# Altium PCB OPENMV4_BASE.PcbDoc
Units mm, origin at the board's own origin, x right, y up, seen from the top; angles counter-clockwise.
Board outline 35 x 44.63 mm, 2 copper layers (Top Layer, Bottom Layer); 49 components, 64 nets, 267 pads, 105 vias.
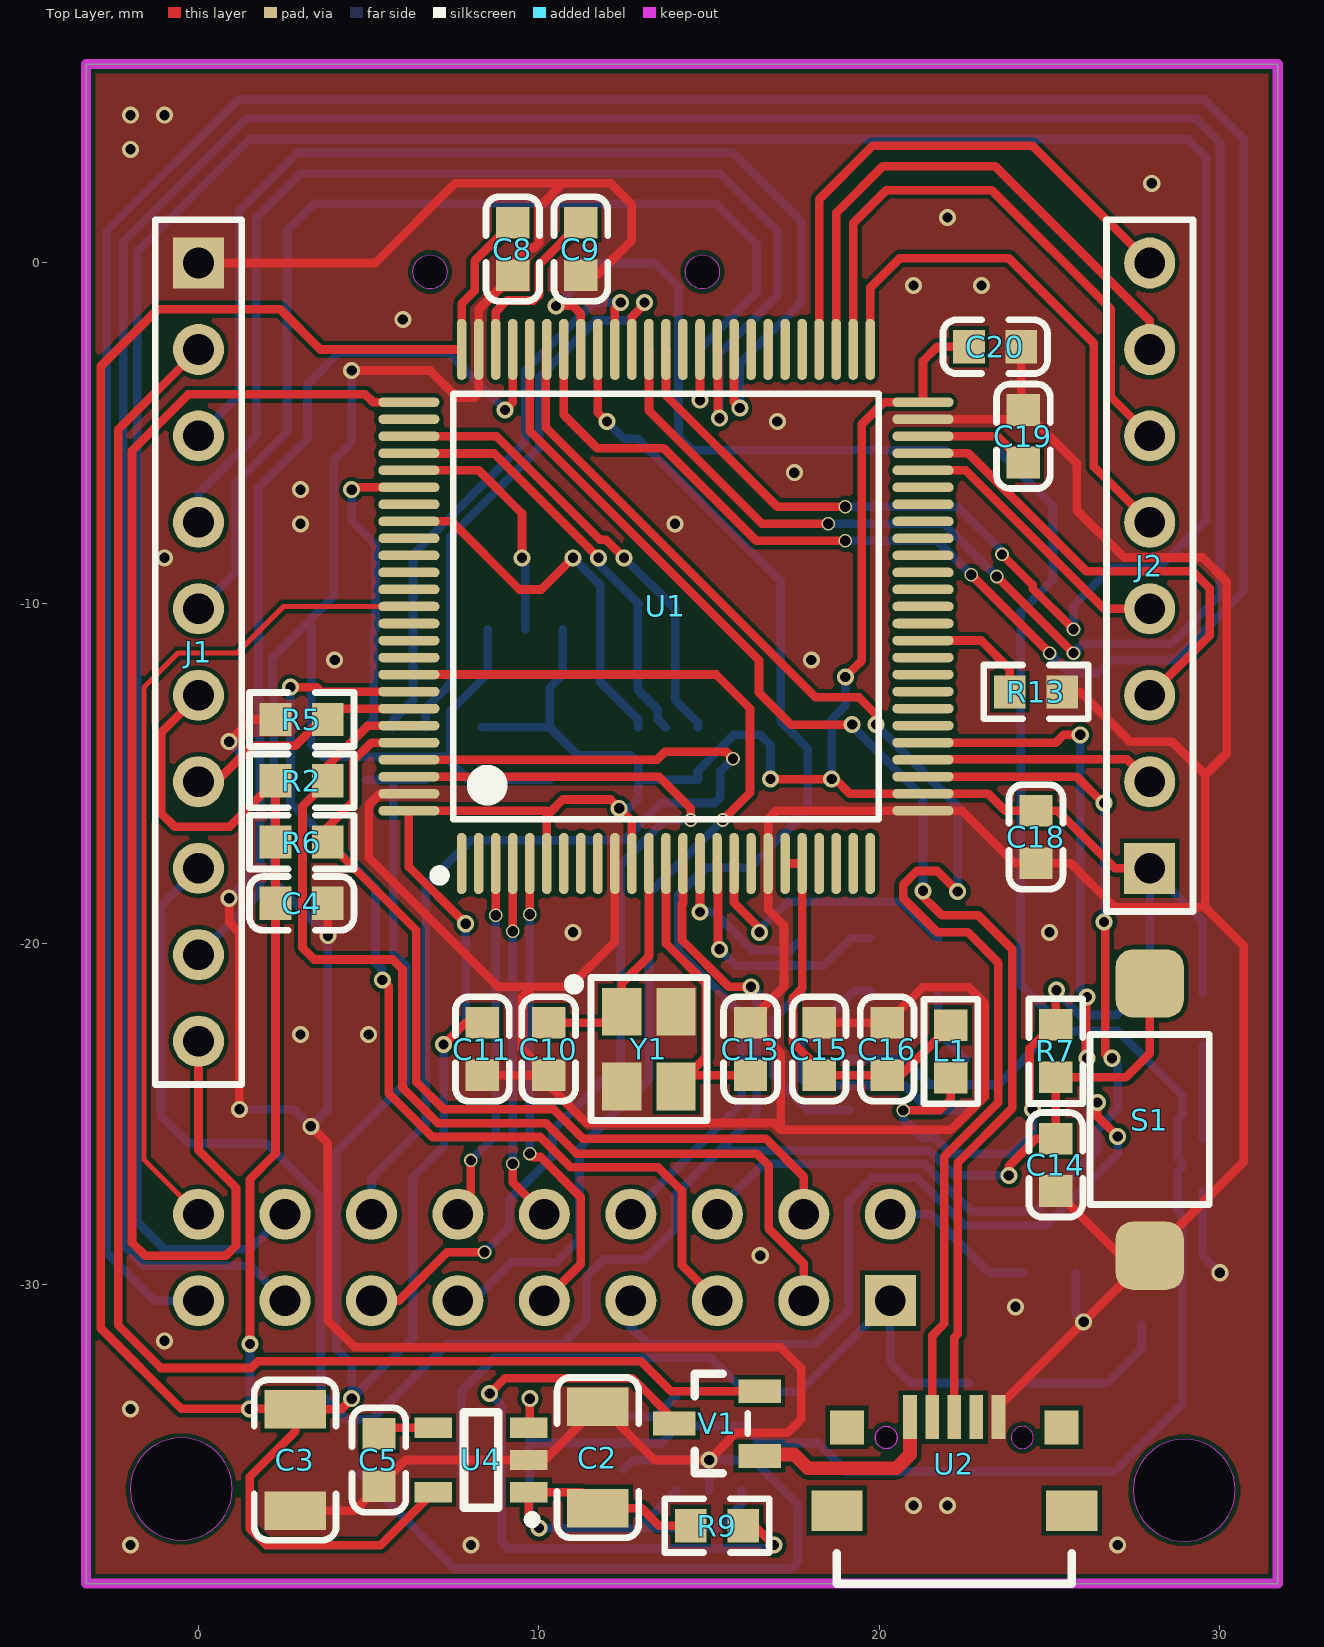
[diagram p0: Top Layer view]
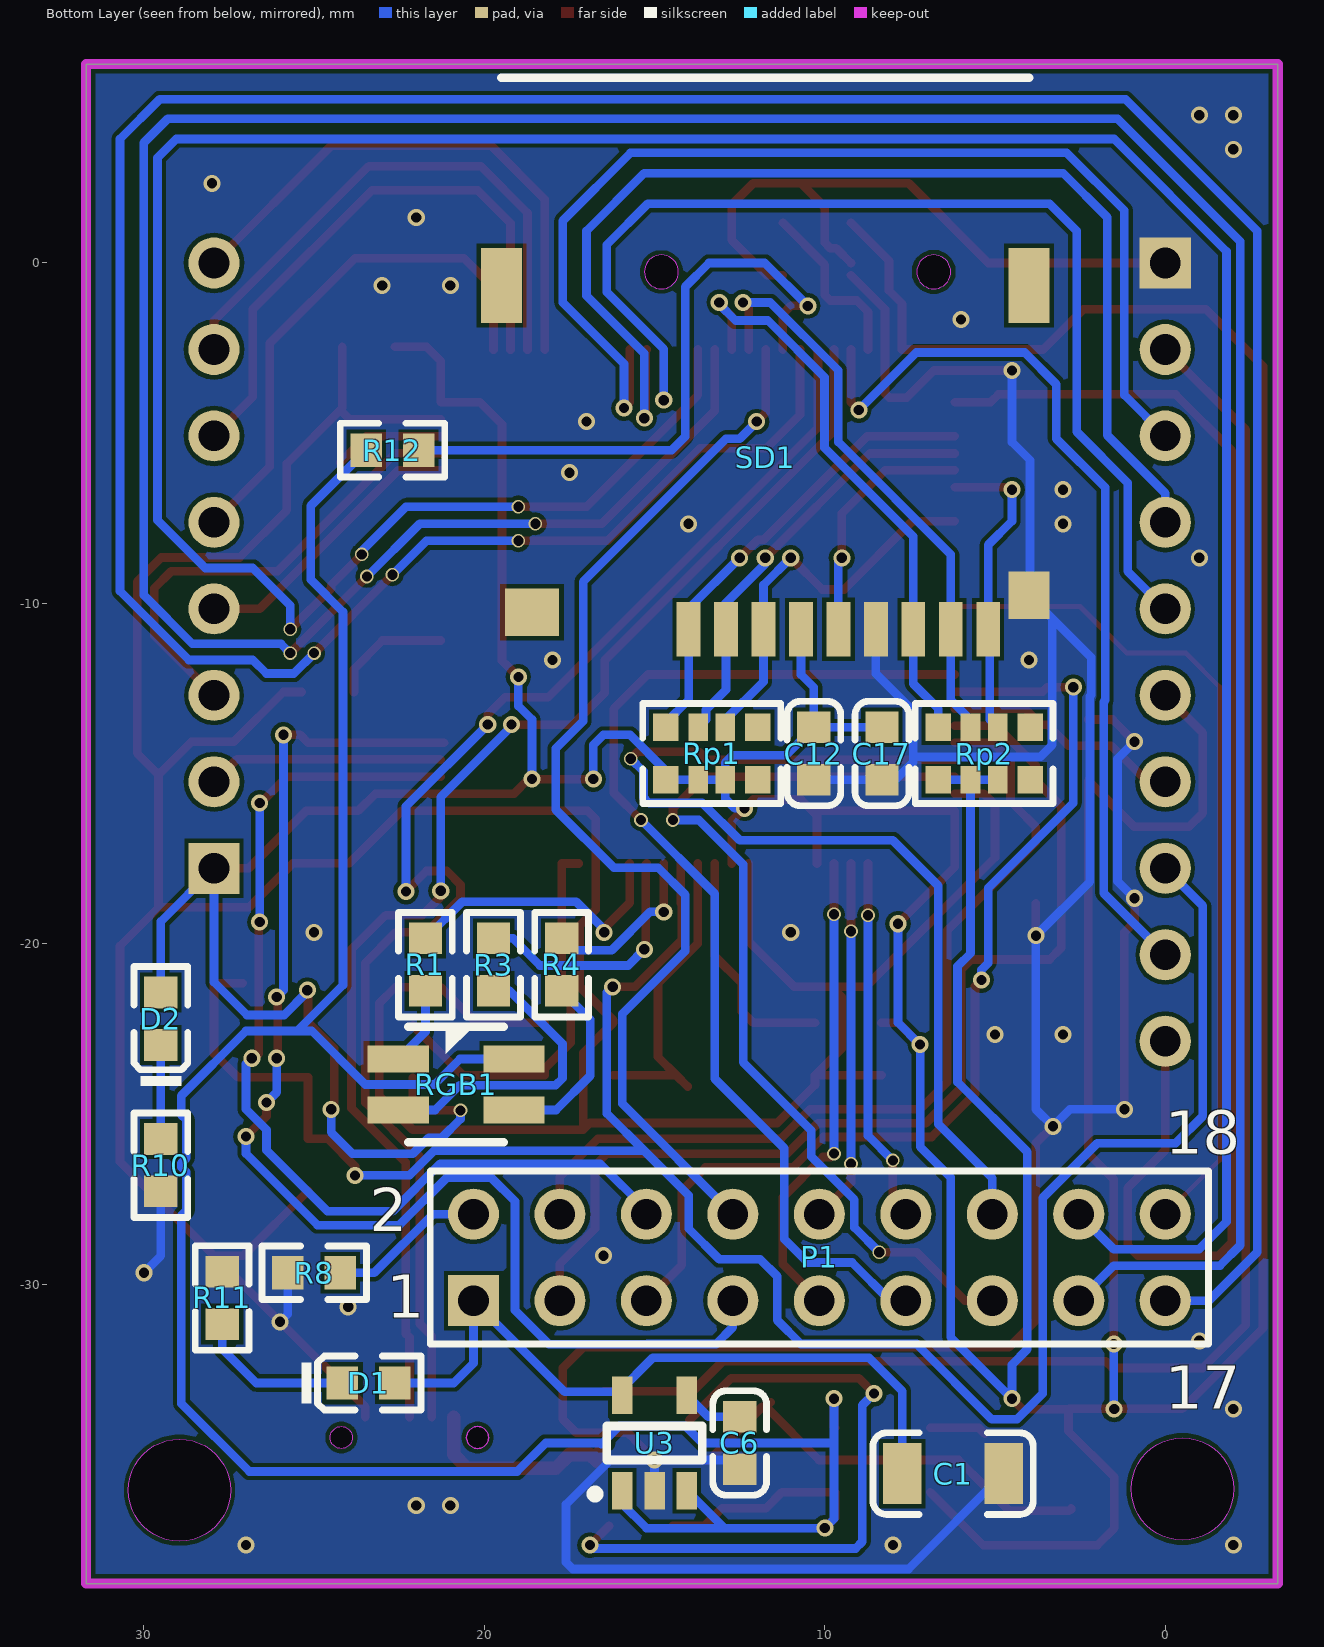
[diagram p1: Bottom Layer view, seen from below]
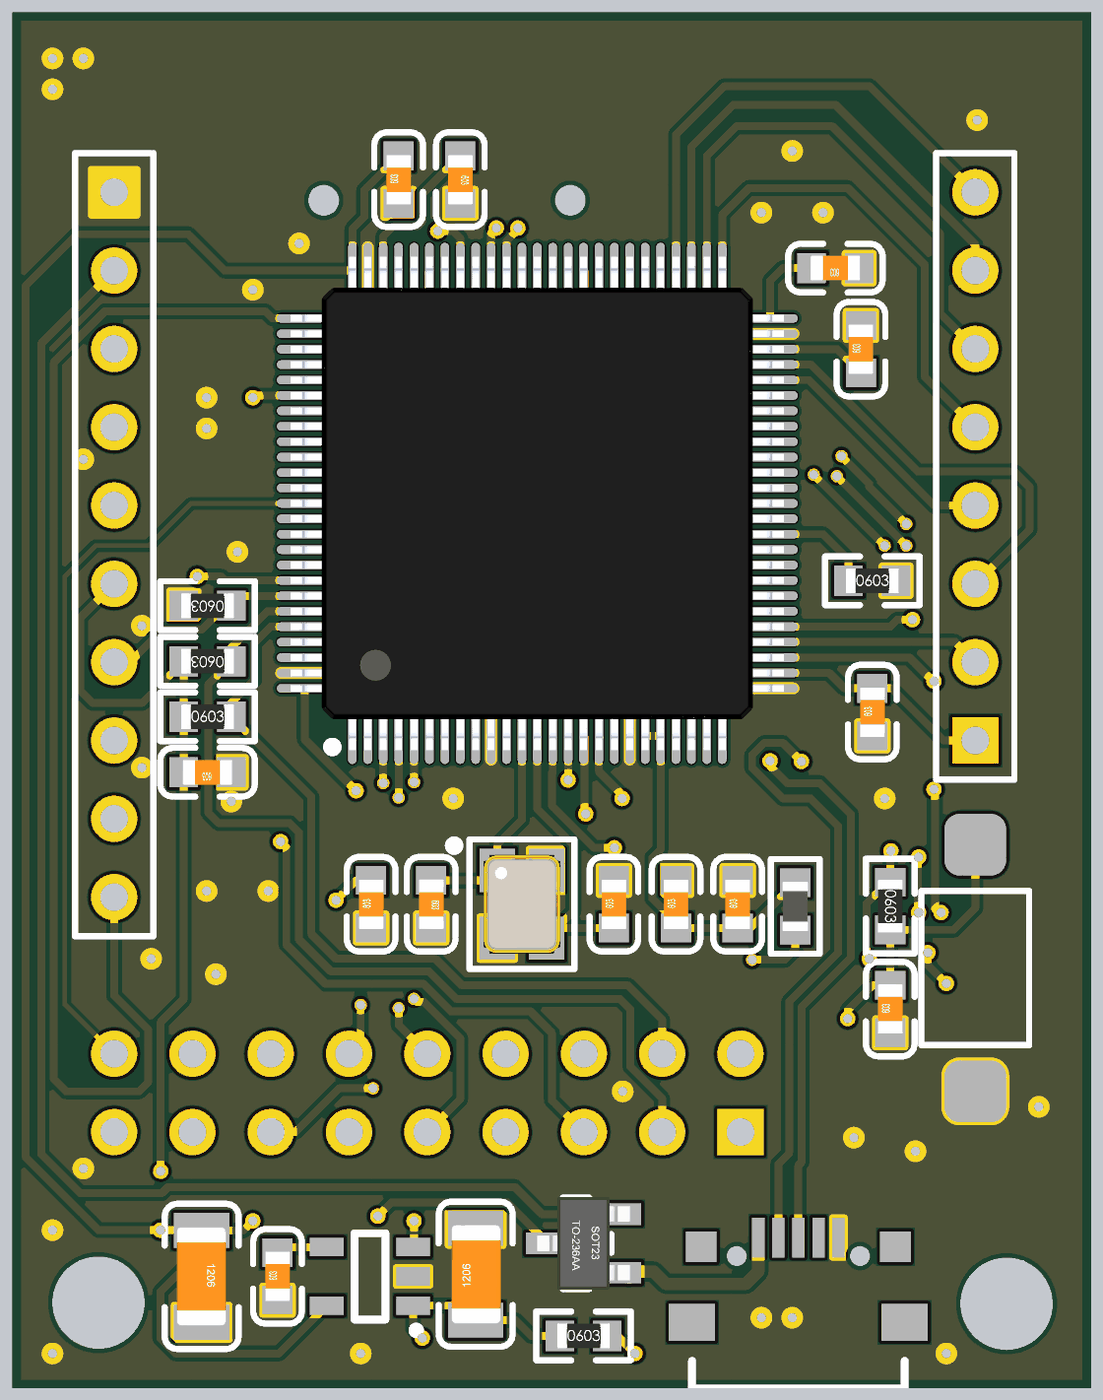
[diagram p2: 3D render of the assembled board from above, using the file's embedded part models]
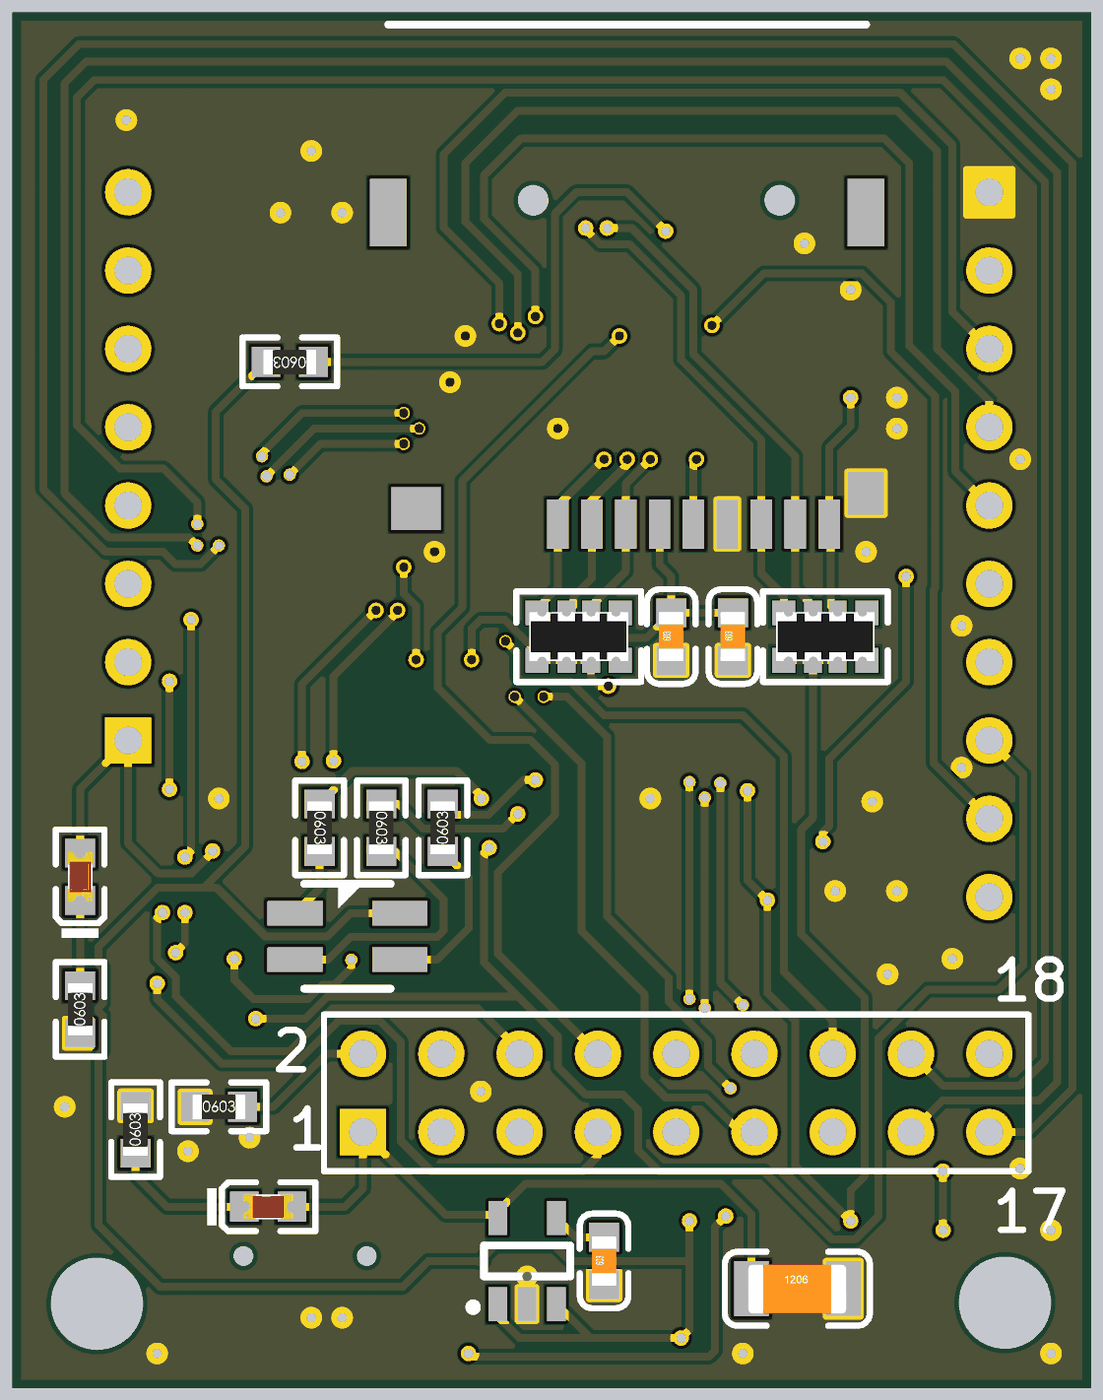
[diagram p3: 3D render of the assembled board from below, using the file's embedded part models]

## Layer stack, top to bottom
Top Solder: solder mask 0.0102, Solder Resist, Dk 3.5
Top Layer: signal copper 0.0356
Dielectric1: dielectric 0.32, FR-4, Dk 4.8
Bottom Layer: signal copper 0.0356
Bottom Solder: solder mask 0.0102, Solder Resist, Dk 3.5

## Board outline
-3.302,-38.791 31.698,-38.791 31.698,5.842 -3.302,5.842
cut-out: 27.455,-36.048 ccw(c28.955,-36.048) 28.955,-37.548 ccw(c28.955,-36.048) 30.455,-36.048 ccw(c28.955,-36.048) 28.955,-34.548 ccw(c28.955,-36.048)
cut-out: -2.007,-36.012 ccw(c-0.507,-36.012) -0.507,-37.512 ccw(c-0.507,-36.012) 0.993,-36.012 ccw(c-0.507,-36.012) -0.507,-34.512 ccw(c-0.507,-36.012)
cut-out: 19.875,-34.5 ccw(c20.2,-34.5) 20.2,-34.825 ccw(c20.2,-34.5) 20.525,-34.5 ccw(c20.2,-34.5) 20.2,-34.175 ccw(c20.2,-34.5)
cut-out: 23.875,-34.5 ccw(c24.2,-34.5) 24.2,-34.825 ccw(c24.2,-34.5) 24.525,-34.5 ccw(c24.2,-34.5) 24.2,-34.175 ccw(c24.2,-34.5)
cut-out: 19.875,-34.5 ccw(c20.2,-34.5) 20.2,-34.825 ccw(c20.2,-34.5) 20.525,-34.5 ccw(c20.2,-34.5) 20.2,-34.175 ccw(c20.2,-34.5)

## Design rules (kind name [scope] priority, off if disabled: settings)
Clearance [All] p1: gap=0.127
FabricationTestpoint [(IsPad And (OnTopLayer Or OnBottomLayer))] p1: side=3 testpointundercomponent=TRUE minsize=1.016 maxsize=2.54 preferedsize=1.524 minholesize=0 maxholesize=1.016 preferedholesize=0.813 testpointgrid=0.025 allowsidetop=TRUE allowsidebottom=TRUE usegrid=TRUE gridtolerance=0
MinimumSolderMaskSliver [All] p1 off: minsoldermaskwidth=0.1
PolygonConnect [All] p1: connectstyle=Direct reliefconductorwidth=0.254 reliefentries=4 polygonreliefangle="90 Angle" airgapwidth=0.254
RoutingVias [All] p1: holewidth=0.3 width=0.4 viastyle="Through Hole" minholewidth=0.3 minwidth=0.4 maxholewidth=0.3 maxwidth=0.4
SilkToSilkClearance [All] p1: silktosilkclearance=0.1
SilkToSolderMaskClearance [IsPad] p1: minsilkscreentomaskgap=0.1 clearancetoexposedcopper=TRUE
SolderMaskExpansion [All] p1: expansion=0.102
Width [All] p1: maxlimit=0.762 minlimit=0.152 preferedwidth=0.254
26 further rules are at their usual default settings.

## Components (designator, comment, footprint, x,y, rotation, side; value= is the part's Value field where it differs from the comment)
C1 "47uF" 1206_C 6.23,-35.56 r180 bottom locked
C2 "47uF" 1206_C 11.73,-35.09 r90 top locked
C3 "47uF" 1206_C 2.84,-35.16 r270 top
C4 "104" 0603_C 3.03,-18.81 r180 top locked
C5 "104" 0603_C 5.3,-35.16 r90 top
C6 "104" 0603_C 12.5,-34.66 r90 bottom locked
C8 "104" 0603_C 9.23,0.41 r90 top locked
C9 "2.2uf" 0603_C 11.23,0.41 r270 top locked
C10 "20pF (200) 5% 50V" 0603_C 10.286,-23.09 r270 top locked
C11 "104" 0603_C 8.336,-23.09 r90 top locked
C12 "10uF" 0603_C 10.32,-14.41 r90 bottom locked
C13 "20pF (200) 5% 50V" 0603_C 16.215,-23.09 r90 top locked
C14 "104" 0603_C 25.18,-26.49 r90 top
C15 "104" 0603_C 18.23,-23.09 r90 top locked
C16 "10uF" 0603_C 20.23,-23.09 r90 top locked
C17 "104" 0603_C 8.32,-14.41 r90 bottom locked
C18 "104" 0603_C 24.6,-16.86 r90 top
C19 "2.2uf" 0603_C 24.23,-5.09 r90 top locked
C20 "104" 0603_C 23.4,-2.46 r180 top locked
D1 "绿灯 0603" 0603_LED_S1 23.4,-32.9 r180 bottom
D2 "绿灯 0603" 0603_LED_S1 29.5,-22.2 r90 bottom
J1 "CON10" HDR1X10 0,0 r270 top locked
J2 "CON8" HDR1X8 27.94,-17.78 r90 top locked
L1 "180nH" 0603_L 22.1,-23.16 r90 top
P1 "Header 9X2" HDR2X9 20.32,-30.48 r180 bottom locked
R1 "1K" 0603_R 21.73,-20.61 r270 bottom locked
R2 "10K" 0603_R 3.03,-15.21 r180 top locked
R3 "1K" 0603_R 19.73,-20.61 r270 bottom locked
R4 "1K" 0603_R 17.73,-20.61 r90 bottom locked
R5 "10K" 0603_R 3.03,-13.41 r180 top locked
R6 "10K" 0603_R 3.03,-17.01 r0 top locked
R7 "10K" 0603_R 25.18,-23.15 r270 top
R8 "0" 0603_R 25,-29.66 r180 bottom locked
R9 "1A保险丝" 0603_R 15.23,-37.09 r0 top locked
R10 "1KΩ (1001) ±1%" 0603_R 29.5,-26.5 r90 bottom
R11 "1KΩ (1001) ±1%" 0603_R 27.7,-30.4 r90 bottom
R12 "0Ω (0R0) ±1%" 0603_R 22.7,-5.5 r0 bottom
R13 "0Ω (0R0) ±1%" 0603_R 24.6,-12.6 r0 top
RGB1 "RGB_LED" RGB3528 20.828,-24.13 r180 bottom
Rp1 "10KΩ (103) ±5%" 0603_Rx4 13.32,-14.41 r180 bottom locked
Rp2 "10KΩ (103) ±5%" 0603_Rx4 5.32,-14.41 r180 bottom locked
S1 "RST" KEY 27.94,-25.16 r90 top locked
SD1 "micro SD" SD 5.2,-10.76 r0 bottom
U1 "STM32H743VIT6" LQFP-100_14x14x05P 13.73,-10.09 r0 top locked
U2 "MICROUSB" "MICRO USB" 22.2,-33.9 r0 top
U3 "MIC5219" SOT-23-5 15,-34.66 r270 bottom locked
U4 "MIC5219" SOT-23-5 8.3,-35.16 r0 top
V1 "BAT54C" SOT-23(SOT-23-3) 15.23,-34.09 r0 top locked
Y1 "12MHZ 20PF 10PPM" SMD-3225_4P 13.23,-23.09 r270 top locked

## Footprints (in the part's own frame and the unit in brackets; to place one, negate y for a bottom-side part, rotate by r counter-clockwise, add the part's x,y. Pads: shape width x height; smd on the part's side, far side on the other; paste and mask are expansions set on the pad)
0603_C [mm]
  rect 0.93x0.98 smd: 1(-0.77,0) 2(0.77,0)
  silkscreen extent -1.53,-0.79 1.54,0.79, body extent -0.8,-0.4 0.8,0.4, height 0.3
0603_L [mm]
  rect 0.93x0.98 smd: 1(-0.77,0) 2(0.77,0)
  silkscreen extent -1.53,-0.79 1.54,0.79, body extent -0.82,-0.41 0.83,0.41, height 0.46
0603_LED_S1 [mm]
  rect 0.93x0.98 smd: A(0.77,0) K(-0.77,0)
  silkscreen extent -1.98,-0.79 1.54,0.79, body extent -0.8,-0.4 0.8,0.4, height 0.6
0603_R [mm]
  rect 0.93x0.98 smd: 1(-0.77,0) 2(0.77,0)
  silkscreen extent -1.53,-0.79 1.54,0.79, body extent -0.85,-0.4 0.85,0.4, height 0.56
0603_Rx4 [mm]
  rect 0.75x0.8 smd mask+0.051: 1(-1.35,-0.77) 4(1.35,-0.77) 5(1.35,0.77) 8(-1.35,0.77)
  rect 0.58x0.8 smd mask+0.051: 2(-0.4,-0.77) 3(0.4,-0.77) 6(0.4,0.77) 7(-0.4,0.77)
  silkscreen extent -2.02,-1.47 2.02,1.47, body extent -1.6,-0.8 1.6,0.8, height 0.55
1206_C [mm]
  rect 1.13x1.8 smd: 1(-1.49,0) 2(1.49,0)
  silkscreen extent -2.36,-1.2 2.35,1.2, body extent -1.6,-0.81 1.6,0.79, height 1
HDR1X8 [mm] "Connector; Header; 8 Position"
  rect 1.5x1.5 hole 0.9: 1(0,0)
  round 1.5 hole 0.9: 2(2.54,0) 3(5.08,0) 4(7.62,0) 5(10.16,0) 6(12.7,0) 7(15.24,0) 8(17.78,0)
  silkscreen extent -1.27,-1.27 19.05,1.27
HDR1X10 [mm] "Connector; Header; 10 Position"
  rect 1.5x1.5 hole 0.9: 1(0,0)
  round 1.5 hole 0.9: 2(2.54,0) 3(5.08,0) 4(7.62,0) 5(10.16,0) 6(12.7,0) 7(15.24,0) 8(17.78,0) 9(20.32,0) 10(22.86,0)
  silkscreen extent -1.27,-1.27 24.13,1.27
HDR2X9 [mm] "Connector; Header; 9x2 Position"
  rect 1.5x1.5 hole 0.9: 1(0,0)
  round 1.5 hole 0.9: 2(0,2.54) 3(2.54,0) 4(2.54,2.54) 5(5.08,0) 6(5.08,2.54) 7(7.62,0) 8(7.62,2.54) 9(10.16,0) 10(10.16,2.54) 11(12.7,0) 12(12.7,2.54) 13(15.24,0) 14(15.24,2.54) 15(17.78,0) 16(17.78,2.54) 17(20.32,0) 18(20.32,2.54)
  silkscreen extent -1.27,-1.27 21.59,3.81
KEY [mm]
  rrect50% 2x2 smd: 1(-4,0) 2(4,0)
  silkscreen extent -2.5,-1.75 2.5,1.75
LQFP-100_14x14x05P [mm]
  oval 0.28x1.8 smd mask+0.051: 1(-6,-7.55) 2(-5.5,-7.55) 3(-5,-7.55) 4(-4.5,-7.55) 5(-4,-7.55) 6(-3.5,-7.55) 7(-3,-7.55) 8(-2.5,-7.55) 9(-2,-7.55) 10(-1.5,-7.55) 11(-1,-7.55) 12(-0.5,-7.55) 13(0,-7.55) 14(0.5,-7.55) 15(1,-7.55) 16(1.5,-7.55) 17(2,-7.55) 18(2.5,-7.55) 19(3,-7.55) 20(3.5,-7.55) 21(4,-7.55) 22(4.5,-7.55) 23(5,-7.55) 24(5.5,-7.55) 25(6,-7.55) 51(6,7.55) 52(5.5,7.55) 53(5,7.55) 54(4.5,7.55) 55(4,7.55) 56(3.5,7.55) 57(3,7.55) 58(2.5,7.55) 59(2,7.55) 60(1.5,7.55) 61(1,7.55) 62(0.5,7.55) 63(0,7.55) 64(-0.5,7.55) 65(-1,7.55) 66(-1.5,7.55) 67(-2,7.55) 68(-2.5,7.55) 69(-3,7.55) 70(-3.5,7.55) 71(-4,7.55) 72(-4.5,7.55) 73(-5,7.55) 74(-5.5,7.55) 75(-6,7.55)
  oval 1.8x0.28 smd mask+0.051: 26(7.55,-6) 27(7.55,-5.5) 28(7.55,-5) 29(7.55,-4.5) 30(7.55,-4) 31(7.55,-3.5) 32(7.55,-3) 33(7.55,-2.5) 34(7.55,-2) 35(7.55,-1.5) 36(7.55,-1) 37(7.55,-0.5) 38(7.55,0) 39(7.55,0.5) 40(7.55,1) 41(7.55,1.5) 42(7.55,2) 43(7.55,2.5) 44(7.55,3) 45(7.55,3.5) 46(7.55,4) 47(7.55,4.5) 48(7.55,5) 49(7.55,5.5) 50(7.55,6) 76(-7.55,6) 77(-7.55,5.5) 78(-7.55,5) 79(-7.55,4.5) 80(-7.55,4) 81(-7.55,3.5) 82(-7.55,3) 83(-7.55,2.5) 84(-7.55,2) 85(-7.55,1.5) 86(-7.55,1) 87(-7.55,0.5) 88(-7.55,0) 89(-7.55,-0.5) 90(-7.55,-1) 91(-7.55,-1.5) 92(-7.55,-2) 93(-7.55,-2.5) 94(-7.55,-3) 95(-7.55,-3.5) 96(-7.55,-4) 97(-7.55,-4.5) 98(-7.55,-5) 99(-7.55,-5.5) 100(-7.55,-6)
  silkscreen extent -6.8,-8.05 6.25,6.25, body extent -8,-8 8,8, height 1.6
"MICRO USB" [mm]
  rect 0.4x1.3 smd: 1(-1.3,0) 2(-0.65,0) 3(0,0) 4(0.65,0) 5(1.3,0)
  rect 1x1 smd: 6(-3.15,-0.3) 7(3.15,-0.3)
  rect 1.5x1.2 smd: 8(-3.45,-2.75) 9(3.45,-2.75)
  Keep-Out Layer board cut-out: 1.675,-0.6 1.7,-0.724 1.77,-0.83 1.876,-0.9 2,-0.925 2,-0.925 2.124,-0.9 2.23,-0.83 2.3,-0.724 2.325,-0.6 2.325,-0.6 2.3,-0.476 2.23,-0.37 2.124,-0.3 2,-0.275 2,-0.275 1.876,-0.3 1.77,-0.37 1.7,-0.476 1.675,-0.6
  Keep-Out Layer board cut-out: -2,-0.925 -2.124,-0.9 -2.23,-0.83 -2.3,-0.724 -2.325,-0.6 -2.325,-0.6 -2.3,-0.476 -2.23,-0.37 -2.124,-0.3 -2,-0.275 -2,-0.275 -1.876,-0.3 -1.77,-0.37 -1.7,-0.476 -1.675,-0.6 -1.675,-0.6 -1.7,-0.724 -1.77,-0.83 -1.876,-0.9 -2,-0.925
  silkscreen extent -3.45,-4.9 3.45,-4
RGB3528 [mm]
  rect 1.8x0.8 smd: 1(-1.7,0.75) 2(1.7,0.75) 3(-1.7,-0.75) 4(1.7,-0.75)
  silkscreen extent -1.4,-1.7 1.4,1.7
SD [mm]
  rect 1.2x2.2 smd: 0(-1.2,-10.1) 0(14.3,-10.1)
  rect 1.6x1.4 smd: 0(13.4,-0.5)
  rect 0.7x1.6 smd: 1(8.8,0) 2(7.7,0) 3(6.6,0) 4(5.5,0) 5(4.4,0) 6(3.3,0) 7(2.2,0) 8(1.1,0) 9(0,0)
  rect 1.2x1.4 smd: 10(-1.2,-1)
  Keep-Out Layer board cut-out: 9.1,-10.5 9.138,-10.691 9.246,-10.854 9.409,-10.962 9.6,-11 9.6,-11 9.791,-10.962 9.954,-10.854 10.062,-10.691 10.1,-10.5 10.1,-10.5 10.062,-10.309 9.954,-10.146 9.791,-10.038 9.6,-10 9.6,-10 9.409,-10.038 9.246,-10.146 9.138,-10.309 9.1,-10.5
  Keep-Out Layer board cut-out: 1.1,-10.5 1.138,-10.691 1.246,-10.854 1.409,-10.962 1.6,-11 1.6,-11 1.791,-10.962 1.954,-10.854 2.062,-10.691 2.1,-10.5 2.1,-10.5 2.062,-10.309 1.954,-10.146 1.791,-10.038 1.6,-10 1.6,-10 1.409,-10.038 1.246,-10.146 1.138,-10.309 1.1,-10.5
  silkscreen extent -1.2,-16.2 14.3,-16.2
SMD-3225_4P [mm]
  rect 1.4x1.15 smd: 1(-1.1,-0.8) 2(1.1,-0.8) 3(1.1,0.8) 4(-1.1,0.8)
  silkscreen extent -2.1,-2.35 2.1,1.7, body extent -1.6,-1.25 1.6,1.25, height 0.61
SOT-23(SOT-23-3) [mm]
  rect 1.25x0.7 smd: 1(1.25,-0.95) 2(1.25,0.95) 3(-1.25,0)
  silkscreen extent -0.65,-1.46 0.9,1.46, body extent -1.5,-1.5 1.5,1.5, height 1.3
SOT-23-5 [mm]
  rect 1.1x0.6 smd: 1(1.4,-0.95) 2(1.4,0) 3(1.4,0.95) 4(-1.4,0.95) 5(-1.4,-0.95)
  silkscreen extent -0.5,-1.88 1.62,1.4

## Part data
C1 C2 C3: library part "Cap Pol1", "Polarized Capacitor (Radial)"
C4 C8 C9 C11 C12 C14 C15 C16 C17 C18 C19 C20: library part CAP
C5 C6: library part CAP104
C10 C13: library part "0603 20pF (200) 5% 50V", "贴片电容"
D1 D2: library part "0603 绿灯", "发光二极管"
L1: library part Inductor
P1: "Header, 9-Pin, Dual row"
R1 R3 R4 R9: library part Res2, "Resistor"
R2 R5 R6 R7 R8: library part RES
R10 R11: library part "0603 1KΩ (1001) 1%", "贴片电阻"
R12 R13: library part "0603 0Ω (0R0) 1%", "贴片电阻"
RGB1: "三色高亮LED"
Rp1 Rp2: library part "0603*4  10KΩ (103) 5%", "贴片排阻"
S1: library part SW-PB, "Switch"
U3 U4: "3.3V 降压芯片"
Y1: library part "SMD-3225_4P  12MHZ 20PF 10PPM", "贴片晶振"

## Via types
v1: diameter 0.5, hole 0.3, Top Layer to Bottom Layer, 85 vias
v2: diameter 0.4, hole 0.3, Top Layer to Bottom Layer, 20 vias

## Nets (pads, with @x,y where several pads share a name; then routed paths per layer and width w, separated by ;. In a path a pad name is that pad's centre, name@x,y a point inside that pad or via, vN(x,y) a via of type N, cw(c..) or ccw(c..) an arc to the next point about the centre after c; other vN are vias at no path point)
3V3: C3.1 C4.2 C8.2 C11.2 C12.2 C17.2 C18.2 C20.2 D2.A J1.6 J2.1 L1.1 R2.2 R6.1 R7.1 Rp1.1 Rp1.2 Rp1.3 Rp2.1 Rp2.2 Rp2.3 SD1.4 U1.6 U1.11 U1.27 U1.50 U1.75 U1.100 U4.5 | length 207.4
  Top Layer w0.254: J1.6 -1.1,-13.8 -1.1,-16.16 -0.7,-16.56 0.91,-16.56 R2.2 R6.1 C4.2 2.26,-26.161 1.511,-26.911 v1(1.511,-31.749) ; C3.1@2.83,-33.66 v1(1.5,-33.66) -0.5,-33.66 -2.873,-31.287 -2.873,-3.033 -1.2,-1.36 2.4,-1.36 3.58,-2.54 U1.75 7.73,-1.193 8.114,-0.809 8.114,0.064 C8.2 ; v1(4.5,-33.36) 4.19,-33.67 C3.1 2.84,-34.32 1.5,-35.66 1.5,-37.17 1.99,-37.66 5.35,-37.66 U4.5 ; v1(7.2,-22.96) 7.84,-22.32 C11.2 ; v1(7.849,-19.409) 6.18,-17.74 U1.100 10.23,-16.09 U1.6 ; 10.3,-16.16 10.7,-15.76 12.1,-15.76 v1(12.358,-16.018) 12.73,-16.39 U1.11 ; v1(16.8,-15.16) v1(18.6,-15.16) 18.7,-15.16 19.13,-15.59 U1.27 23.2,-15.59 23.7,-16.09 C18.2 25.23,-16.09 26.92,-17.78 J2.1 ; v1(19,-12.16) 19.3,-11.86 19.479,-11.681 19.479,-4.74 20.13,-4.09 U1.50 21.28,-2.88 21.7,-2.46 C20.2 ; v2(20.701,-24.892) 21.768,-24.892 22.1,-24.56 L1.1 ; v1(24.5,-24.86) 24.411,-24.771 24.411,-23.071 25.102,-22.38 R7.1 v1@25.18,-21.38
  Bottom Layer w0.254: v1@1.511,-33.66 v1(1.511,-31.749) ; Rp2.3 Rp2.2 ; Rp2.1 Rp2.2 ; v1(7.849,-19.409) 7.849,-22.311 v1(7.2,-22.96) 7.2,-25.96 6.3,-26.86 6.3,-31.56 v1(4.5,-33.36) 4.5,-32.36 4.051,-31.911 4.051,-26.109 6.1,-24.06 6.1,-20.66 5.72,-20.28 Rp2.2 ; C17.2 C12.2 ; SD1.4 10.7,-12.09 10.32,-12.47 C12.2 ; v1(12.358,-16.018) 12.642,-16.018 12.92,-15.74 Rp1.3 ; v1(16.8,-15.16) 16.8,-14.16 16.5,-13.86 15.722,-13.86 14.67,-14.912 Rp1.1 Rp1.2 Rp1.3 ; v1(18.6,-15.16) 18.6,-13.411 19,-13.011 v1(19,-12.16) ; v2(20.701,-24.892) 20.701,-25.146 21.253,-25.698 21.637,-25.698 22.101,-26.162 23.876,-26.162 24.5,-25.538 v1(24.5,-24.86) ; v1(25.2,-21.36) 25.2,-21.409 25.881,-22.089 26.971,-22.089 27.94,-21.12 J2.1 29.5,-19.34 D2.A ; C12.2 11.14,-14.46 12.7,-14.46 12.92,-14.68 Rp1.3
3V3_SENSOR: C1.1 D1.A P1.1 U3.5 | length 21.3
  Bottom Layer w0.254: C1.1 7.72,-33.14 8.7,-32.16 15.05,-32.16 16.05,-33.16 17.64,-33.16 P1.1 20.32,-32.32 20.9,-32.9 D1.A
5V_IN: U2.1 V1.1 | length 6
  Top Layer w0.254: V1.1 V1.1@16.653,-34.867
  Top Layer w0.4: V1.1@16.7,-35.2 16.9,-35 17.5,-35 17.9,-35.4 20.5,-35.4 20.9,-35 U2.1
ALL_IN: R9.2 V1.3 | length 19.7
  Top Layer w0.254: v1(8.554,-33.206) 9.005,-32.755 12.746,-32.755 13.98,-33.99 V1.3 ; R9.2@16.33,-37.09 v1(16.9,-37.66)
  Bottom Layer w0.254: v1(8.554,-33.206) 8.9,-33.552 8.9,-37.56 9.1,-37.76 16.8,-37.76 v1(16.9,-37.66)
BOOT0: J1.7 R5.1 U1.94 | length 7.2
  Top Layer w0.254: J1.7 0.52,-15.24 1.581,-14.179 2.841,-14.179 3.46,-13.56 3.8,-13.56 R5.1 4.12,-13.09 U1.94
DAC: J2.2 U1.29 | length 6.9
  Top Layer w0.254: U1.29 21.295,-14.575 27.275,-14.575 J2.2
"DCMI CLK": P1.8 U1.67 | length 32.6
  Top Layer w0.254: U1.67 11.73,-4.39 v1(12,-4.66)
  Bottom Layer w0.254: v1(12,-4.66) 12.5,-5.16 12.9,-5.16 17.1,-9.36 17.1,-13.46 17.9,-14.26 17.9,-16.06 16.2,-17.76 14.9,-17.76 14.1,-18.56 14.1,-20.21 15.95,-22.06 15.95,-24.69 P1.8
"DCMI D0": P1.16 U1.63 | length 99.2
  Top Layer w0.254: U1.63 13.73,-3.89 17,-7.16 v2(19,-7.16) ; v2(23.6,-8.56) 24.5,-9.46 24.5,-9.56 v2(25.7,-10.76)
  Bottom Layer w0.254: P1.16 1.511,-28.969 -0.991,-28.969 -1.8,-28.16 -1.8,0.34 1.5,3.64 29.051,3.64 29.6,3.091 29.6,-7.56 28.2,-8.96 26.8,-8.96 25.7,-10.06 v2(25.7,-10.76) ; v2(19,-7.16) 22.3,-7.16 23.6,-8.46 v2(23.6,-8.56)
"DCMI D1": P1.15 U1.64 | length 104.4
  Top Layer w0.254: U1.64 13.23,-4.34 16.551,-7.66 v2(18.5,-7.66) ; v2(23.45,-9.21) v2(25.7,-11.46)
  Bottom Layer w0.254: P1.15 1.511,-29.451 -1.609,-29.451 -2.206,-28.854 -2.206,0.634 1.4,4.24 29.3,4.24 30.006,3.534 30.006,-9.754 28.571,-11.189 25.971,-11.189 v2(25.7,-11.46) ; v2(18.5,-7.66) 21.9,-7.66 v2(23.45,-9.21)
"DCMI D2": P1.14 U1.97 | length 31
  Top Layer w0.254: U1.97 13.47,-14.59 13.7,-14.36 15.5,-14.36 v2(15.7,-14.56)
  Bottom Layer w0.254: P1.14 5.08,-26.88 6.671,-25.289 6.671,-18.289 8,-16.96 12.5,-16.96 13.6,-15.86 15.16,-15.86 15.325,-15.696 15.325,-14.935 v2(15.7,-14.56)
"DCMI D3": P1.13 U1.98 | length 28.6
  Top Layer w0.254: P1.13 5.88,-30.48 7.3,-29.06 v2(8.4,-29.06) ; U1.98 13.53,-15.09 14.46,-16.02 v2(14.46,-16.36)
  Bottom Layer w0.254: v2(8.4,-29.06) 9.131,-28.329 9.131,-27.514 10.4,-26.244 10.4,-25.48 12.4,-23.48 12.4,-17.66 13.7,-16.36 v2(14.46,-16.36)
"DCMI D4": P1.12 U1.3 | length 10.8
  Top Layer w0.254: P1.12 8,-27.56 v2(8,-26.36) ; v2(8.73,-19.16) U1.3
  Bottom Layer w0.254: v2(8,-26.36) 8.73,-25.63 v2(8.73,-19.16)
"DCMI D5": P1.11 U1.92 | length 32.4
  Top Layer w0.254: U1.92 15.2,-12.09 16.2,-13.09 16.2,-15.56 v2(15.4,-16.36)
  Bottom Layer w0.254: P1.11 8.08,-30.48 9.2,-29.36 10.5,-29.36 11.189,-28.671 11.189,-26.001 13.23,-23.96 13.23,-18.53 v2(15.4,-16.36)
"DCMI D6": P1.10 U1.4 | length 10.7
  Top Layer w0.254: v2(9.23,-26.46) 9.23,-27.01 P1.10 ; v2(9.23,-19.63) U1.4
  Bottom Layer w0.254: v2(9.23,-26.46) v2(9.23,-19.63)
"DCMI D7": P1.9 U1.5 | length 14
  Top Layer w0.254: v2(9.73,-26.16) 9.83,-26.26 10.051,-26.26 11.23,-27.44 11.23,-29.41 P1.9 ; v2(9.73,-19.13) U1.5
  Bottom Layer w0.254: v2(9.73,-26.16) v2(9.73,-19.13)
"DCMI HSYNC": P1.6 U1.28 | length 29.5
  Top Layer w0.254: U1.28 25.8,-15.09 26.57,-15.86 v1(26.6,-15.86) v1@26.6,-15.89 ; v1(26.6,-19.36) 26.629,-19.389 26.629,-23.231 26.759,-23.36 v1(26.829,-23.36)
  Bottom Layer w0.254: P1.6 15.24,-27.82 16.6,-26.46 21.3,-26.46 22.694,-27.854 24.606,-27.854 26.4,-26.06 26.4,-25.46 27,-24.86 27,-23.531 v1(26.829,-23.36) ; v1(26.6,-19.36) v1(26.6,-15.86)
"DCMI PCLK": P1.7 U1.30 | length 38.3
  Top Layer w0.254: U1.30@21.18,-14.09 U1.30 25.18,-14.09 25.41,-13.86 v1(25.9,-13.86) ; v1@26.071,-23.36 26.071,-21.589 v1(26.1,-21.56) ; v1(26.4,-24.66) 26.4,-25.06 v1(27,-25.66)
  Bottom Layer w0.254: P1.7 12.7,-31.26 13.194,-31.754 15.218,-31.754 15.225,-31.76 18.1,-31.76 19.1,-30.76 19.1,-27.56 19.794,-26.866 21.106,-26.866 22.5,-28.26 24.9,-28.26 27,-26.16 v1(27,-25.66) v1@26.9,-25.66 ; v1(25.9,-13.86) 25.9,-21.36 v1(26.1,-21.56) ; v1(26.1,-23.36) 26.1,-24.36 v1(26.4,-24.66)
"DCMI PWDN": P1.18 U1.88 | length 24.9
  Top Layer w0.152: P1.18 -1.6,-26.34 -1.6,-12.46 -0.6,-11.46 1.13,-11.46 2.5,-10.09 U1.88
"DCMI RST": P1.17 U1.69 | length 108.1
  Top Layer w0.254: U1.69 10.73,-4.46 11.715,-5.445 13.665,-5.445 16.38,-8.16 v2(19,-8.16) ; v2(22.7,-9.16) v2(25,-11.46)
  Bottom Layer w0.254: P1.17 -1.28,-30.48 -2.7,-29.06 -2.7,0.94 1.166,4.806 29.534,4.806 30.7,3.64 30.7,-9.635 28.675,-11.66 26.8,-11.66 26.4,-12.06 25.6,-12.06 v2(25,-11.46) ; v2(19,-8.16) 21.7,-8.16 v2(22.7,-9.16)
"DCMI VSYNC": P1.5 U1.93 | length 30.1
  Top Layer w0.254: v1(2.7,-12.46) 3.47,-12.46 3.6,-12.59 U1.93 ; v1(5.4,-21.06) 5.587,-21.247 5.587,-24.397 6.863,-25.673 10.038,-25.673 10.932,-26.566 13.506,-26.566 14.2,-27.26 14.2,-29.44 P1.5
  Bottom Layer w0.254: v1(2.7,-12.46) 2.7,-15.86 5.2,-18.36 5.2,-20.56 5.4,-20.76 v1(5.4,-21.06)
DGND: P1.2 R8.2 | length 4.6
  Bottom Layer w0.254: P1.2 21.51,-27.94 23.23,-29.66 R8.2
GND: C1.2 C2.2 C3.2 C4.1 C5.1 C6.1 C8.1 C9.2 C10.2 C11.1 C12.1 C13.2 C14.1 C15.2 C16.2 C17.1 C18.1 C19.2 C20.1 J1.1 R5.2 R8.1 R10.1 R11.2 R13.2 S1.1 SD1.6 SD1.10 U1.10 U1.19 U1.26 U1.49 U1.74 U1.99 U2.5 U3.2 U4.2 Y1.2 Y1.4 | length 266.3
  Top Layer w0.254: J1.1 5.197,0 7.537,2.34 10.7,2.34 ; v1(0.9,-18.66) 0.9,-19.36 1.2,-19.66 v1(1.2,-24.86) ; v1(0.9,-14.06) 1.55,-13.41 R5.2 ; C3.2@2.76,-36.619 C3.2@2.76,-36.58 ; C3.2 4.58,-36.65 C5.1 6.07,-35.16 U4.2 10.17,-35.16 C2.2 ; v1(3.3,-25.36) 3.8,-25.86 3.8,-31.06 4.594,-31.854 17.094,-31.854 17.7,-32.46 17.7,-33.96 17.3,-34.36 15.79,-34.36 15.576,-34.574 15.576,-34.584 v1(15,-35.16) 14.999,-35.161 13.397,-35.161 11.835,-33.6 C2.2 ; v1(3.8,-19.76) C4.1@3.8,-18.81 ; v1(4.5,-3.16) 6.8,-3.16 7.6,-3.96 8.1,-3.96 8.23,-3.83 U1.74 8.23,-1.36 C8.1 ; U1.99 5.327,-15.59 5.001,-15.916 5.001,-17.461 8.8,-21.26 9.8,-21.26 ; C11.1 C10.2 ; C8.1@9.23,0 9.666,0.436 9.836,0.436 10,0.6 10,1.64 10.7,2.34 ; C9.2 11.7,-0.36 12.73,0.67 12.73,1.71 12.1,2.34 10.7,2.34 ; C2.2@11.591,-33.46 C2.2 ; U1.10 12.23,-19.93 10.9,-21.26 9.8,-21.26 ; v1@14.95,-35.21 v1@15,-35.21 ; C15.2 C16.2 21.28,-21.27 22.61,-21.27 23.087,-21.747 23.087,-24.473 22.1,-25.46 17.1,-25.46 ; U1.49 23.96,-4.59 C19.2 ; U2.5 23.5,-33.6 v1(26,-31.1) S1.1 ; C20.1 24.17,-4.259 C19.2 ; C14.1 27.081,-29.16 S1.1 ; R13.2 25.9,-12.6 27.36,-14.06 28.6,-14.06 29.569,-15.029 ; 9.8,-21.26 9.5,-21.56 9.5,-23.073 C10.2 ; C10.2 10.286,-24.146 11.4,-25.26 16.9,-25.26 17.1,-25.46 ; 17.1,-25.46 17.1,-23.205 C13.2 16.215,-22.247 17.2,-21.261 17.2,-19.46 16.73,-18.99 U1.19 16.73,-16.33 16.97,-16.09 U1.26 22.43,-16.09 23.97,-17.63 C18.1 25.618,-17.63 26.918,-18.929 29.569,-18.929 ; C19.2 25.8,-5.889 25.8,-7.26 27.189,-8.649 29.489,-8.649 30.2,-9.36 30.2,-14.399 29.569,-15.029 ; S1.1 30.7,-26.4 30.7,-20.06 29.569,-18.929 ; 29.569,-18.929 29.569,-15.029
  Bottom Layer w0.254: v1(0.9,-18.66) 1.4,-18.16 1.4,-14.56 v1(0.9,-14.06) ; v1(1.2,-24.86) 2.8,-24.86 v1(3.3,-25.36) 3.8,-24.86 v1(3.8,-19.76) 2.213,-18.173 2.213,-12.721 2.171,-12.679 2.171,-11.589 3.316,-10.444 ; v1(4.5,-3.16) 4.5,-5.26 3.971,-5.789 3.971,-9.731 SD1.10 3.316,-10.444 ; C1.2 7.54,-38.36 17.4,-38.36 17.6,-38.16 17.6,-36.465 16.295,-35.16 v1(15,-35.16) 12.77,-35.16 C6.1 ; SD1.6 8.5,-12.06 7.4,-13.16 7.4,-14.46 ; C12.1 C17.1 7.92,-15.18 7.4,-14.66 7.4,-14.46 ; U3.2 v1@15,-35.36 ; R8.1 25.77,-30.87 v1(26,-31.1) ; R10.1 29.5,-29.16 v1(30,-29.66) ; 3.316,-10.444 3.316,-14.156 3.661,-14.5 7.359,-14.5 7.4,-14.46
  other v1: -2,-37.66 8,-37.66 27,-37.66 21,-36.5 22,-36.5 -2,-33.66 -1,-31.66 24,-30.66 16.5,-29.16 3,-22.66 5,-22.66 11,-19.66 25,-19.66 4,-11.66 18,-11.66 -1,-8.66 3,-7.66 14,-7.66 3,-6.66 17.5,-6.16 17,-4.66 6,-1.66 21,-0.66 23,-0.66 22,1.34 28,2.34 -2,3.34 -2,4.34 -1,4.34
I2C1_SCL: P1.3 R2.1 U1.95 | length 31.3
  Top Layer w0.254: U1.95 4.97,-13.59 4.545,-14.015 4.381,-14.179 3.8,-14.76 R2.1 3.056,-15.954 3.056,-20.116 3.4,-20.46 5.7,-20.46 5.994,-20.754 5.994,-24.228 7.032,-25.266 10.206,-25.266 11.1,-26.16 16.4,-26.16 16.751,-26.511 16.751,-28.366 17.78,-29.396 P1.3
I2C1_SDA: P1.4 R6.2 U1.96 | length 26.3
  Top Layer w0.254: U1.96 5.07,-14.09 4.545,-14.615 4.545,-15.815 4.381,-15.979 3.8,-16.56 R6.2 6.4,-19.609 6.4,-24.06 7.2,-24.86 10.425,-24.86 11.285,-25.72 16.66,-25.72 17.78,-26.84 P1.4
I2C2_SCL: J2.4 U1.46 | length 8.3
  Top Layer w0.254: U1.46 22.53,-6.09 26.6,-10.16 J2.4
I2C2_SDA: J2.3 U1.47 | length 13.9
  Top Layer w0.254: U1.47 22.61,-5.59 26.076,-9.056 29.196,-9.056 29.7,-9.56 29.7,-10.94 J2.3
"LED B": R1.1 U1.17 | length 8.5
  Top Layer w0.254: U1.17@15.76,-17.669 U1.17 15.73,-18.79 16.48,-19.54 v1(16.48,-19.66)
  Bottom Layer w0.254: v1(16.48,-19.66) 16.48,-19.58 17.3,-18.76 20.65,-18.76 R1.1
"LED G": R3.1 U1.16 | length 7.5
  Top Layer w0.254: U1.16 15.26,-17.669 15.26,-20.12 v1(15.3,-20.16)
  Bottom Layer w0.254: v1(15.3,-20.16) 15.775,-20.635 18.365,-20.635 19.16,-19.84 R3.1
"LED R": R4.2 U1.15 | length 5
  Top Layer w0.254: v1(14.73,-19.06) U1.15
  Bottom Layer w0.254: v1(14.73,-19.06) 15.132,-19.06 16.261,-20.189 17.381,-20.189 R4.2
NetC5_2: C5.2 U4.4 | length 1.7
  Top Layer w0.254: C5.2 5.48,-34.21 U4.4
NetC6_2: C6.2 U3.4 | length 1.8
  Bottom Layer w0.254: C6.2 13.42,-33.89 U3.4
NetC9_1: C9.1 U1.73 | length 5.2
  Top Layer w0.254: U1.73 8.73,-1.434 9.061,-1.104 9.836,-1.104 10,-0.94 10,-0.05 C9.1
NetC10_1: C10.1 U1.12 Y1.1 | length 7
  Top Layer w0.254: C10.1 12.1,-22.32 Y1.1 12.43,-21.16 13.23,-20.36 U1.12
NetC13_1: C13.1 U1.13 Y1.3 | length 9.2
  Top Layer w0.254: U1.13 13.73,-19.99 14.9,-21.16 14.9,-23.32 Y1.3@14.36,-23.86 ; Y1.3 Y1.3@14.36,-23.86 ; C13.1 Y1.3@14.36,-23.86
NetC15_1: C15.1 C16.1 L1.2 U1.20 U1.21 | length 11.6
  Top Layer w0.254: U1.20 U1.21 17.73,-21.306 17.461,-21.575 17.461,-22.9 18.23,-23.67 C15.1 C16.1 20.63,-23.86 L1.2
NetC19_1: C19.1 U1.48 | length 3.3
  Top Layer w0.254: U1.48 23.46,-5.09 C19.1
NetD1_K: D1.K R11.1 | length 4.7
  Bottom Layer w0.254: D1.K 26.7,-32.9 27.7,-31.9 R11.1
NetD2_K: D2.K R10.2 | length 2.8
  Bottom Layer w0.254: R10.2 D2.K
NetR1_2: R1.2 RGB1.1 | length 2.3
  Bottom Layer w0.254: R1.2 21.73,-22.582 RGB1.1
NetR3_2: R3.2 RGB1.3 | length 8.9
  Bottom Layer w0.254: R3.2 19.26,-21.38 17.704,-22.936 17.704,-23.952 17.907,-24.155 20.726,-24.155 21.451,-24.88 RGB1.3
NetR4_1: R4.1 RGB1.4 | length 5.5
  Bottom Layer w0.254: R4.1 16.891,-22.219 16.891,-23.876 17.895,-24.88 RGB1.4
NetR12_1: R12.1 U1.68 | length 18.7
  Top Layer w0.254: v1(10.5,-1.26) 11,-1.26 11.23,-1.49 U1.68
  Bottom Layer w0.254: v1(10.5,-1.26) 11.76,0 13.4,0 14.1,-0.7 14.1,-5.1 14.5,-5.5 R12.1
NetR13_1: R13.1 U1.36 | length 3.6
  Top Layer w0.254: U1.36 22.99,-11.09 23.83,-11.93 R13.1
NRST: C14.2 J1.8 R7.2 S1.2 U1.14 | length 64.5
  Top Layer w0.254: U1.14 14.23,-18.811 14.201,-18.841 14.201,-19.886 15.575,-21.26 v1(16.23,-21.26) ; v1(23.8,-26.8) 23.8,-26.53 24.61,-25.72 C14.2 R7.2 27.24,-23.92 27.94,-23.22 S1.2 S1.2@27.1,-21.16
  Bottom Layer w0.254: J1.8 -1.1,-18.88 -1.1,-25.06 -0.3,-25.86 2,-25.86 3.6,-27.46 3.6,-33.209 4.351,-33.96 5.1,-33.96 7.306,-31.754 10.7,-31.754 11.4,-31.054 11.4,-29.76 11.9,-29.26 13.1,-29.26 14,-28.36 14,-27.381 15.302,-26.079 ; v1(16.23,-21.26) 16.4,-21.43 16.4,-24.981 15.302,-26.079 ; v1(23.8,-26.8) 22.2,-26.8 21.479,-26.079 15.302,-26.079
P_IN: J1.2 V1.2 | length 49.4
  Top Layer w0.254: J1.2 -2.362,-4.902 -2.362,-31.198 -1.1,-32.46 1.549,-32.46 1.749,-32.26 13,-32.26 13.88,-33.14 V1.2
PB12: J2.5 U1.51 | length 15.7
  Top Layer w0.254: U1.51 19.73,-0.73 20.6,0.14 23.8,0.14 26.3,-2.36 26.3,-5.98 J2.5
PB13: J2.6 U1.52 | length 17.3
  Top Layer w0.254: U1.52 19.23,1.17 20.2,2.14 23.3,2.14 26.8,-1.36 26.8,-3.94 J2.6
PB14: J2.7 U1.53 | length 16.5
  Top Layer w0.254: U1.53 18.73,1.47 20.1,2.84 23.4,2.84 27.94,-1.7 J2.7
PB15: J2.8 U1.54 | length 16.2
  Top Layer w0.254: U1.54 18.23,1.87 19.8,3.44 24.5,3.44 J2.8
PD12: J1.3 U1.59 | length 33.2
  Top Layer w0.254: U1.59 15.73,-4.09 v1(15.9,-4.26)
  Bottom Layer w0.254: J1.3 1.2,-3.88 1.2,1.54 2.894,3.234 15.706,3.234 17.7,1.24 17.7,-1.16 15.9,-2.96 v1(15.9,-4.26)
PD13: J1.4 U1.60 | length 34.5
  Top Layer w0.254: U1.60 15.26,-2.569 15.26,-4.52 v1(15.3,-4.56)
  Bottom Layer w0.254: J1.4 0,-6.76 1.7,-5.06 1.7,1.34 3,2.64 15.3,2.64 17,0.94 17,-0.96 15.3,-2.66 v1(15.3,-4.56)
PD14: J1.5 U1.61 | length 33.6
  Top Layer w0.254: v1(14.73,-4.03) U1.61
  Bottom Layer w0.254: J1.5 1.1,-9.06 1.1,-6.46 2.6,-4.96 2.6,0.94 3.4,1.74 15.2,1.74 16.4,0.54 16.4,-0.86 14.73,-2.53 v1(14.73,-4.03)
SD_CD: Rp2.6 SD1.9 U1.81 | length 9.1
  Top Layer w0.254: v1(4.5,-6.66) 4.57,-6.59 U1.81
  Bottom Layer w0.254: v1(4.5,-6.66) 4.5,-7.58 5.2,-8.28 SD1.9 5.151,-10.809 5.151,-13.409 Rp2.6
SDIO_CLK: SD1.5 U1.80 | length 7.3
  Top Layer w0.254: U1.80 8.23,-6.09 9.5,-7.359 v1(9.5,-8.66)
  Bottom Layer w0.254: v1(9.5,-8.66) 9.6,-8.76 SD1.5
SDIO_CMD: Rp1.6 SD1.3 U1.83 | length 11.8
  Top Layer w0.254: U1.83 7.43,-7.59 9.43,-9.59 10.07,-9.59 v1(11,-8.66)
  Bottom Layer w0.254: v1(11,-8.66) 11.8,-9.46 SD1.3 11.8,-12.299 12.92,-13.42 Rp1.6
SDIO_D0: Rp2.8 SD1.7 U1.65 | length 17.2
  Top Layer w0.254: U1.65 12.73,-1.578 13.1,-1.209 v1(13.1,-1.16)
  Bottom Layer w0.254: Rp2.8 6.67,-13.09 7.4,-12.36 SD1.7 7.4,-8.035 10.006,-5.428 10.006,-3.354 11.671,-1.689 12.619,-1.689 13.1,-1.209 v1(13.1,-1.16)
SDIO_D1: Rp2.7 SD1.8 U1.66 | length 17.2
  Top Layer w0.254: U1.66 12.23,-1.33 v1(12.4,-1.16)
  Bottom Layer w0.254: Rp2.7 5.72,-13.42 6.3,-12.84 SD1.8 6.3,-8.56 9.6,-5.26 9.6,-3.16 11.6,-1.16 v1(12.4,-1.16)
SDIO_D2: Rp1.8 SD1.1 U1.78 | length 13.7
  Top Layer w0.254: U1.78 8.753,-5.09 11.794,-8.131 11.971,-8.131 v1(12.5,-8.66)
  Bottom Layer w0.254: v1(12.5,-8.66) 14,-10.16 SD1.1 14,-12.834 14.67,-13.505 Rp1.8
SDIO_D3: Rp1.7 SD1.2 U1.79 | length 12.7
  Top Layer w0.254: U1.79 6.186,-5.596 8.684,-5.596 v1(11.749,-8.66)
  Bottom Layer w0.254: v1(11.749,-8.66) 11.749,-8.834 12.937,-10.023 12.9,-10.06 SD1.2 12.9,-12.534 13.49,-13.124 13.49,-13.409 Rp1.7
SWCLK: J1.10 U1.76 | length 42
  Top Layer w0.254: J1.10 0,-26.06 1.1,-27.16 1.1,-28.86 0.8,-29.16 -1.566,-29.16 -1.956,-28.771 -1.956,-5.516 -0.3,-3.86 4.9,-3.86 5.13,-4.09 U1.76
SWDIO: J1.9 U1.72 | length 26.9
  Top Layer w0.254: v1(9,-4.32) 9.23,-4.089 U1.72
  Bottom Layer w0.254: J1.9 1.806,-18.514 1.806,-12.89 1.764,-12.848 1.764,-6.596 3.2,-5.16 3.2,-3.56 4.129,-2.631 7.311,-2.631 v1(9,-4.32)
USB_DM: U1.70 U2.2 | length 41.8
  Top Layer w0.254: U1.70 10.201,-2.569 10.201,-4.831 18.13,-12.76 19.4,-12.76 19.9,-13.26 v1(19.9,-13.56) ; U2.2 21.55,-31.51 21.9,-31.16 21.9,-26.254 23.494,-24.66 23.494,-20.554 22.6,-19.66 21.7,-19.66 20.7,-18.66 20.7,-18.26 21.1,-17.86 21.7,-17.86 v1(22.3,-18.46)
  Bottom Layer w0.254: v1(19.9,-13.56) 22.3,-15.96 v1(22.3,-18.46)
USB_DP: U1.71 U2.3 | length 39.7
  Top Layer w0.254: U1.71 9.73,-4.935 16.462,-11.666 16.462,-12.622 17.4,-13.56 v1(19.2,-13.56) ; v1@21.196,-18.525 21.831,-19.16 22.9,-19.16 23.9,-20.16 23.9,-24.828 22.306,-26.422 22.306,-31.328 22.3,-31.335 22.3,-31.46 22.2,-31.56 U2.3
  Bottom Layer w0.254: v1(19.2,-13.56) 19.2,-13.609 21.28,-15.689 v1(21.28,-18.44) v1@21.18,-18.44
VIN: C2.1 R9.1 R12.2 RGB1.2 U3.1 U3.3 U4.1 U4.3 | length 79.7
  Top Layer w0.254: U4.3 9.73,-34.18 v1(9.73,-33.36) ; v1(10,-37.16) 9.7,-36.86 U4.1 11.261,-36.11 C2.1 13.02,-36.58 13.53,-37.09 R9.1
  Bottom Layer w0.254: v1(9.73,-33.36) 9.73,-34.66 ; U3.3 12.95,-37.16 ; U3.1 15.95,-36.45 15.24,-37.16 12.95,-37.16 ; 16.4,-34.66 16.53,-34.66 ; 16.565,-34.695 16.53,-34.66 ; RGB1.2 20.713,-23.38 21.463,-24.13 23.495,-24.13 25.065,-22.56 25.5,-22.56 ; R12.2 25.1,-7.13 25.1,-9.3 24.15,-10.25 24.15,-21.21 25.5,-22.56 ; 9.73,-34.66 13.6,-34.66 14.1,-34.16 16.03,-34.16 16.53,-34.66 ; 9.73,-34.66 9.73,-36.89 v1(10,-37.16) 12.95,-37.16 ; 16.53,-34.66 18.2,-34.66 19.04,-35.5 26.9,-35.5 28.9,-33.5 28.9,-27.984 28.756,-27.84 28.756,-26.7 28.9,-26.556 28.9,-26.444 28.756,-26.3 28.756,-25.16 28.9,-25.016 28.9,-24.46 27,-22.56 25.5,-22.56
pads on no net: Rp1.4 Rp1.5 Rp2.4 Rp2.5 SD1.0 U1.1 U1.2 U1.7 U1.8 U1.9 U1.18 U1.22 U1.23 U1.24 U1.25 U1.31 U1.32 U1.33 U1.34 U1.35 U1.37 U1.38 U1.39 U1.40 U1.41 U1.42 U1.43 U1.44 U1.45 U1.55 U1.56 U1.57 U1.58 U1.62 U1.77 U1.82 U1.84 U1.85 U1.86 U1.87 U1.89 U1.90 U1.91 U2.4 U2.6 U2.7 U2.8 U2.9

## Polygon pours and split planes (outlines as drawn)
GND on Top Layer "Bottom Layer-No Net" (solid, remove dead copper, pour order 14): 31.75,6.35 -3.81,6.35 -3.81,-39.37 31.75,-39.37 31.75,6.35
GND on Bottom Layer "Bottom Layer-No Net" (solid, remove dead copper, pour order 16): 31.75,6.35 -3.81,6.35 -3.81,-39.37 31.75,-39.37 31.75,6.35

## Keep-outs
Keep-Out Layer:
  the board outline again, w0.3
Mechanical 1:
  circle w0.152: c-0.507,-36.012 r1.5
  lines w0.152: -3.302,-38.791 -3.302,5.842 31.698,5.842 31.698,-38.791 -3.302,-38.791

## Silkscreen, mask and mechanical layers (free items; w line width, h text height)
Mechanical 1:
  circle w0.152: c28.955,-36.048 r1.5

## Text inside footprints (layer, text, board x,y; h text height)
P1: Bottom Overlay "2" at 23.368,-28.448 h1.27; Bottom Overlay "1" at 22.86,-30.988 h1.27; Bottom Overlay "17" at 0,-33.66 h1.27; Bottom Overlay "18" at 0,-26.16 h1.27